# EAGLE board v0.5 (EAGLE 9.3.2)

Size 96 x 95 mm. Coordinates in mm from the lower left corner, seen from the top.
Outline: 0,95 96,95 96,0 0,0 0,95
Copper layers (1*16): Top 0.035mm / dielectric 1.5mm / Bottom 0.035mm
Design rules "default": minimum track width 6mil, minimum drill 0.35mm, track to track 6mil, track to pad 6mil, pad to pad 6mil, via to via 6mil, smd to smd 6mil, copper to edge 40mil, drill to drill 6mil, minimum pad ring 10mil, minimum via ring 8mil, stop-mask expansion 4mil, vias tented up to drill 0mil, thermal gap 10mil

## Footprints (pad centres in the part's own frame; a part is rotated, then mirrored left to right if it is on the bottom)
C025-025X050 = drill 0.813 octagon: 1 -1.27,0; 2 1.27,0
MA09-1 = drill 1.016 long: 1 -10.16,0; 2 -7.62,0; 3 -5.08,0; 4 -2.54,0; 5 0,0; 6 2.54,0; 7 5.08,0; 8 7.62,0; 9 10.16,0
LED3MM = drill 0.813 octagon: A -1.27,0; K 1.27,0
PAK100/2500-14 = drill 1 pad 1.422: 1 -7.62,-1.27; 2 -7.62,1.27; 3 -5.08,-1.27; 4 -5.08,1.27; 5 -2.54,-1.27; 6 -2.54,1.27; 7 0,-1.27; 8 0,1.27; 9 2.54,-1.27; 10 2.54,1.27; 11 5.08,-1.27; 12 5.08,1.27; 13 7.62,-1.27; 14 7.62,1.27
MA08-1 = drill 1.016 long: 1 -8.89,0; 2 -6.35,0; 3 -3.81,0; 4 -1.27,0; 5 1.27,0; 6 3.81,0; 7 6.35,0; 8 8.89,0
0204/5 = drill 0.813 octagon: 1 -2.54,0; 2 2.54,0
PAK100/2500-40 = drill 1 pad 1.422: 1 -24.13,-1.27; 2 -24.13,1.27; 3 -21.59,-1.27; 4 -21.59,1.27; 5 -19.05,-1.27; 6 -19.05,1.27; 7 -16.51,-1.27; 8 -16.51,1.27; 9 -13.97,-1.27; 10 -13.97,1.27; 11 -11.43,-1.27; 12 -11.43,1.27; 13 -8.89,-1.27; 14 -8.89,1.27; 15 -6.35,-1.27; 16 -6.35,1.27; 17 -3.81,-1.27; 18 -3.81,1.27; 19 -1.27,-1.27; 20 -1.27,1.27; 21 1.27,-1.27; 22 1.27,1.27; 23 3.81,-1.27; 24 3.81,1.27; 25 6.35,-1.27; 26 6.35,1.27; 27 8.89,-1.27; 28 8.89,1.27; 29 11.43,-1.27; 30 11.43,1.27; 31 13.97,-1.27; 32 13.97,1.27; 33 16.51,-1.27; 34 16.51,1.27; 35 19.05,-1.27; 36 19.05,1.27; 37 21.59,-1.27; 38 21.59,1.27; 39 24.13,-1.27; 40 24.13,1.27
XD-2308-01-R = drill 0.6: + 0,0; - 10,0

## Placement (x,y rotation side)
10UF  [C025-025X050]  15,10 0 bottom
100NF  [C025-025X050]  15,15 0 bottom
LCD  [MA09-1]  10.16,73.42 270 top
LED1  [LED3MM]  83,38 0 top
LIPO  2514-  [PAK100/2500-14]  89,79 270 top
RFID  [MA08-1]  10.16,26.59 270 top
RLED  [0204/5]  76,38 0 top
RPI  2540-  [PAK100/2500-40]  35,55 270 top
U$1  XD-2308-01-R  [XD-2308-01-R]  83,10 90 top

## Library data of the parts
10UF 100NF = rcl; SPICEPREFIX: C
LCD RFID = con-lstb; OC_FARNELL: unknown; OC_NEWARK: unknown
LED1 = led
LIPO RPI = con-3m; OC_FARNELL: unknown; OC_NEWARK: unknown
RLED = rcl; SPICEPREFIX: R
U$1 = XD-2308-01-R speaker

## Nets
3.3V: LCD.1 LIPO.1 RFID.1 RPI.1
5V: LIPO.2 RPI.2
GND: LCD.2 LED1.K RFID.3 RPI.39 U$1.-
LCD_DCRS: LCD.5 RPI.37
LCD_LED: LCD.8 RPI.16
LCD_RESET: LCD.4 RPI.22
LOWBAT: LIPO.7 RPI.7
N$4: LIPO.6 RPI.6
N$11: LED1.A RLED.2
RFID_RESET: RFID.2 RPI.36
SPI0_CS0: LCD.3 RPI.24
SPI0_MISO: LCD.9 RPI.21
SPI0_MOSI: LCD.6 RPI.19
SPI0_SCK: LCD.7 RPI.23
SPI1_CS0: RFID.8 RPI.12
SPI1_MISO: RFID.5 RPI.35
SPI1_MOSI: RFID.6 RPI.38
SPI1_SCK: RFID.7 RPI.40

## Tracks (layer width: path | path; a pad name or v marks a point on that pad's centre or on a via)
3.3V  (3 unrouted)
5V  (1 unrouted)
GND  (4 unrouted)
LCD_DCRS  (1 unrouted)
LCD_LED  (1 unrouted)
LCD_RESET  (1 unrouted)
LOWBAT  (1 unrouted)
N$4  (1 unrouted)
N$11  (1 unrouted)
RFID_RESET  (1 unrouted)
SPI0_CS0  (1 unrouted)
SPI0_MISO  (1 unrouted)
SPI0_MOSI  (1 unrouted)
SPI0_SCK  (1 unrouted)
SPI1_CS0  (1 unrouted)
SPI1_MISO  (1 unrouted)
SPI1_MOSI  (1 unrouted)
SPI1_SCK  (1 unrouted)

## Text on the board
tPlace: 2.2" SPI LCD | GangScan v0.3 | SPI RFID